# Altium PCB PCB1_Left Leg.PcbDoc
Units mm, origin at the board's own origin, x right, y up, seen from the top; angles counter-clockwise.
Board outline 70 x 20 mm, 4 copper layers (Top Layer, PWR5, PWR3.3, Bottom Layer), stack 0.603 mm thick; 43 components, 41 nets, 196 pads, 123 vias.
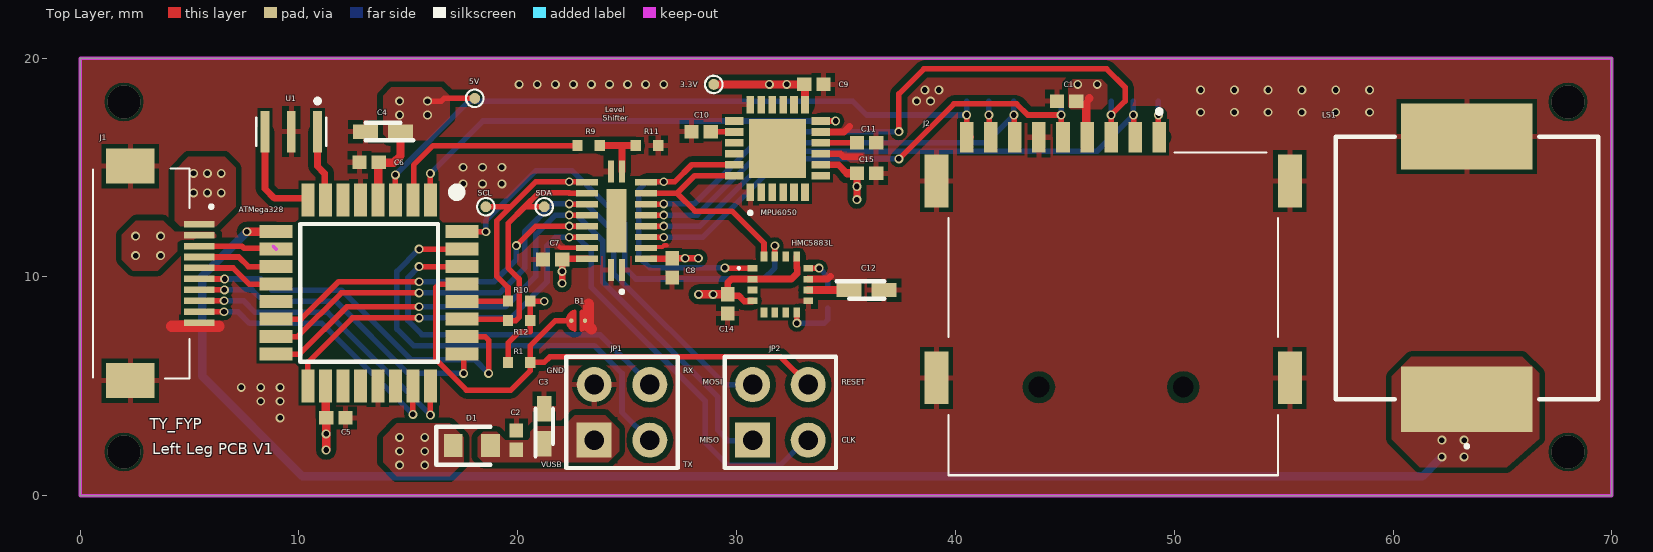
[diagram p0: Top Layer view]
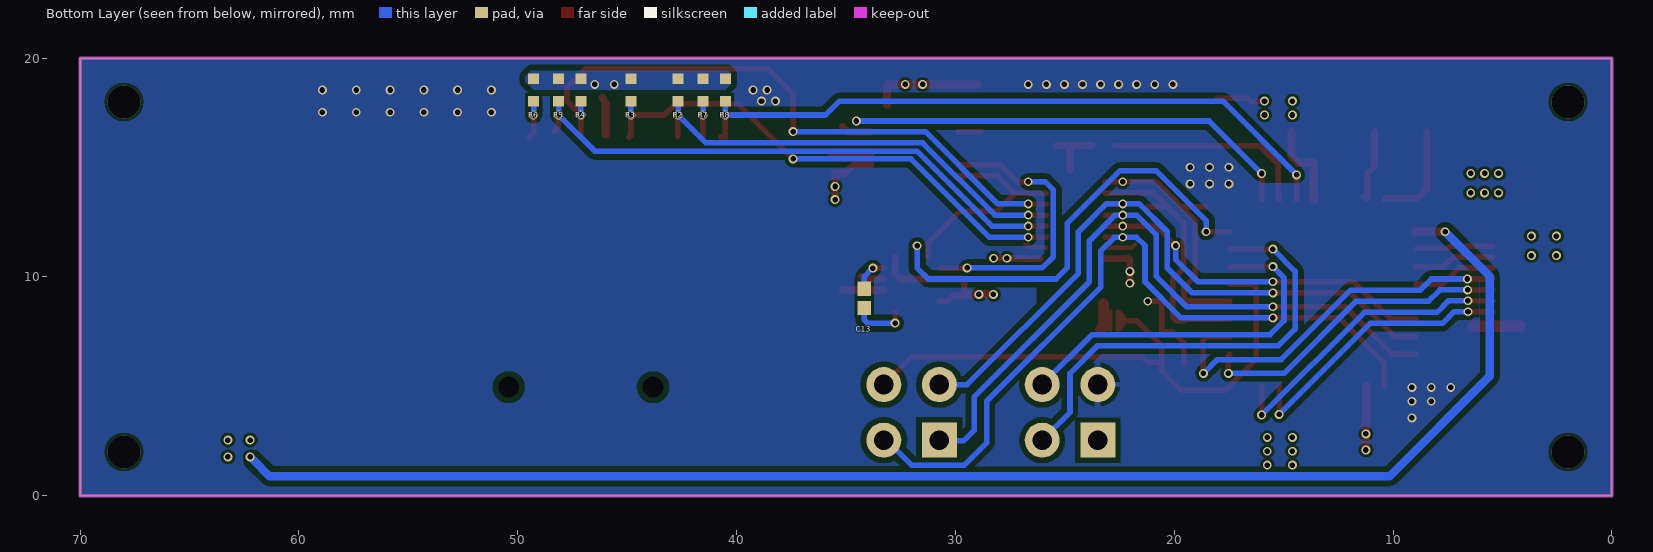
[diagram p1: Bottom Layer view, seen from below]
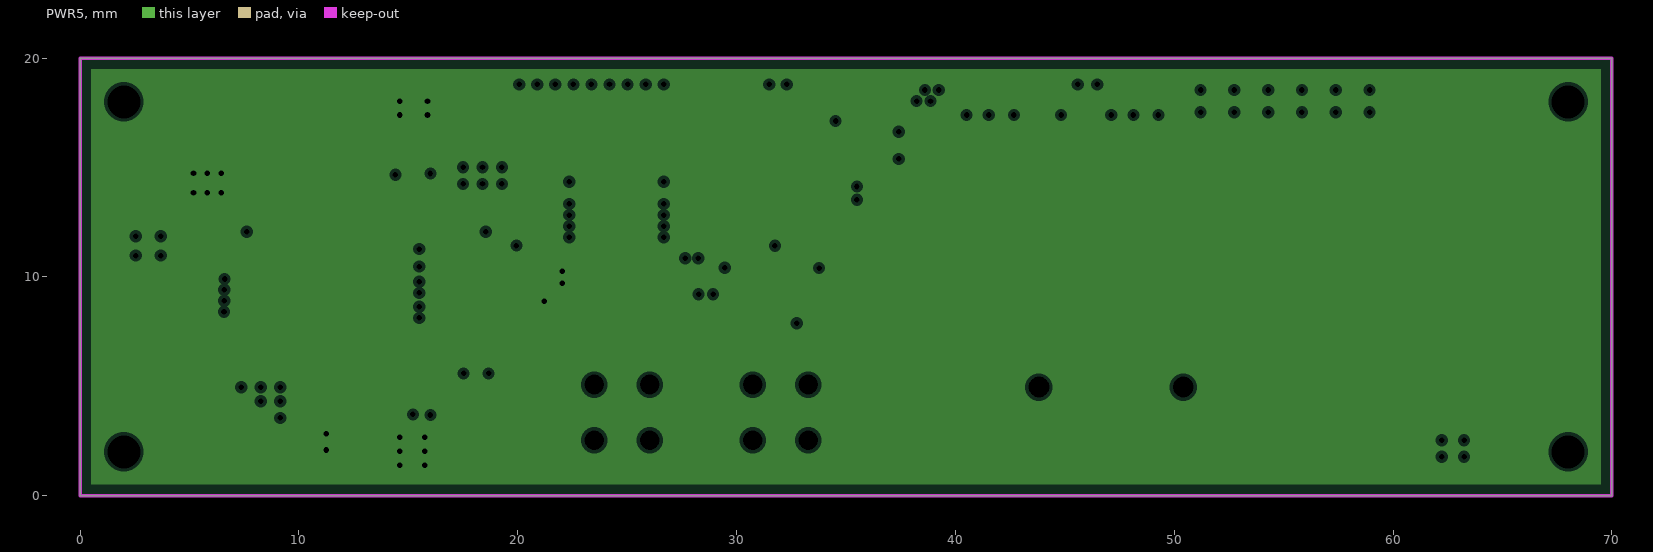
[diagram p2: PWR5, clearances drawn from the general rule]
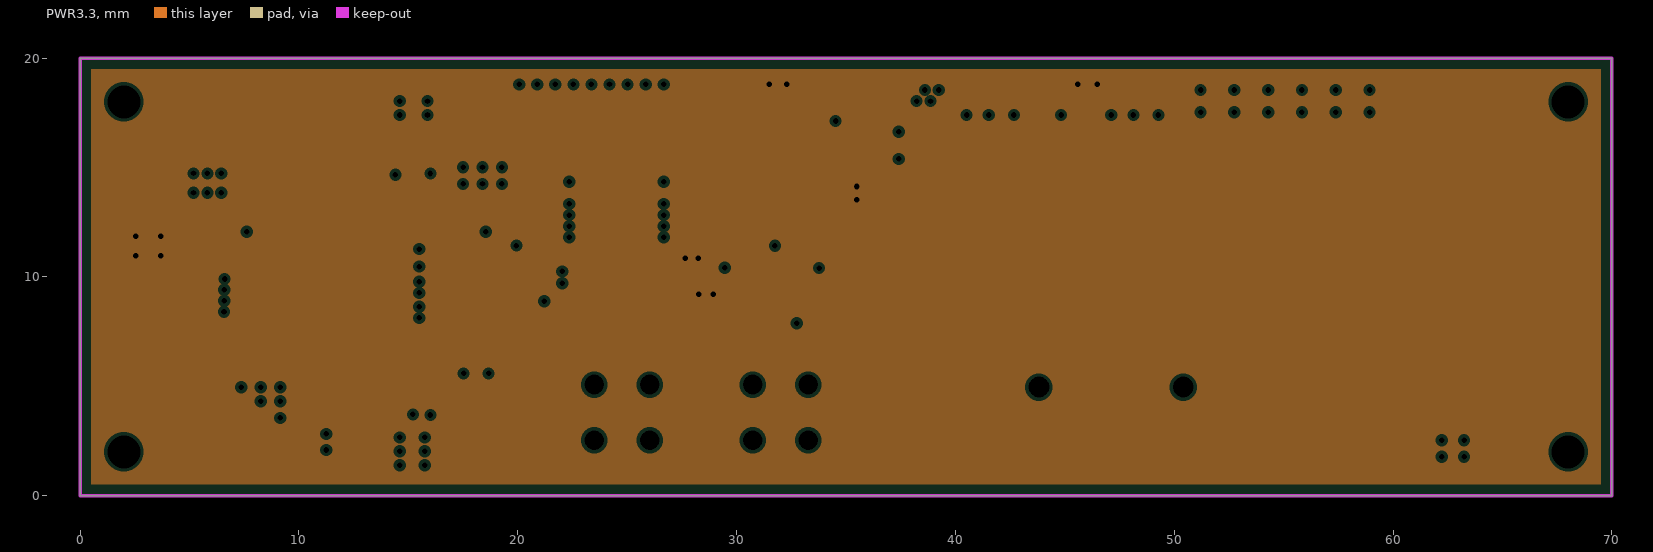
[diagram p3: PWR3.3, clearances drawn from the general rule]

## Layer stack, top to bottom
Top Solder: solder mask 0.0102, Solder Resist, Dk 3.5
Top Layer: signal copper 0.0356
Dielectric 2: prepreg 0.0711, PP-006, Dk 4.1
PWR5: plane copper 0.035, net 5V
Dielectric 1: dielectric 0.32, FR-4, Dk 4.8
PWR3.3: plane copper 0.035, net 3.3V
Dielectric 3: prepreg 0.0711, PP-006, Dk 4.1
Bottom Layer: signal copper 0.0356
Bottom Solder: solder mask 0.0102, Solder Resist, Dk 3.5

## Board outline
0,0 0,20 70,20 70,0

## Design rules (kind name [scope] priority, off if disabled: settings)
Clearance [All] p1: gap=0.254 ignorepadtopadclearanceinfootprint=FALSE except(0: Arc-Hole Track-Hole SMDPad-Hole THPad-Hole Via-Hole Fill-Hole Poly-Hole Region-Hole Text-Hole; 0.127: SMDPad-Poly Via-Poly)
PlaneClearance [All] p1: clearance=0.152
PlaneConnect [All] p1: planeconnectstyle=Relief reliefexpansion=0.127 reliefentries=4 reliefconductorwidth=0.152 reliefairgap=0.127
PolygonConnect [InNet('GND')] p1: thpad.connectstyle=Relief thpad.reliefconductorwidth=0.254 thpad.reliefentries=4 thpad.polygonreliefangle="90 Angle" thpad.airgapwidth=0.203 smdpad.connectstyle=Relief smdpad.reliefconductorwidth=0.254 smdpad.reliefentries=4 smdpad.polygonreliefangle="90 Angle" smdpad.airgapwidth=0.203 via.connectstyle=Direct via.reliefconductorwidth=0.254 via.reliefentries=4 via.polygonreliefangle="90 Angle" via.airgapwidth=0.203
PolygonConnect PolygonConnect_1 [All] p2: connectstyle=Direct reliefconductorwidth=0.254 reliefentries=4 polygonreliefangle="90 Angle" airgapwidth=0.254
RoutingVias [All] p1: holewidth=0.254 width=0.406 viastyle="Through Hole" minholewidth=0.254 minwidth=0.406 maxholewidth=0.508 maxwidth=0.508
SolderMaskExpansion [All] p1: expansion=0.064 useseparateexpansions=TRUE expansionbottom=0.064
Width [All] p1: maxlimit=1.524 minlimit=0.127 preferedwidth=0.152
28 further rules are at their usual default settings.

## Classes and differential pairs
component class "Main Board": 3.3V 5V ATMega328 B1 C1 C2 C3 C4 C5 C6 C8 C9 C10 C11 C12 C13 C14 C15 D1 HMC5883L J1 J2 JP1 JP2 LS1 MPU6050 R4 R5 R10 R11 R12 SCL SDA U1

## Components (designator, comment, footprint, x,y, rotation, side; value= is the part's Value field where it differs from the comment)
3.3V "Test Point" TP_SMD_D1.0mm 28.956,18.796 r90 top (schematic designator TP1)
5V "Test Point" TP_SMD_D1.0mm 18.034,18.161 r90 top (schematic designator TP2)
ATMega328 "ATMEGA328PB-AU" QFP80P900X900X120-32N 13.208,9.271 r270 top (schematic designator IC1)
B1 "solderbridge" Solderbridge 22.449,8.001 r0 top
C1 "0402_100n" CAPC1005X55N 45.085,18.034 r0 top
C2 "0402_100n" CAPC1005X55N 19.939,2.54 r90 top
C3 "0603_4.7u" CAPPM168X90N 21.209,3.175 r90 top
C4 "0603_4.7u" CAPPM168X90N 13.843,16.637 r180 top
C5 "0402_1u" CAPC1005X55N 11.684,3.556 r0 top
C6 "0402_1u" CAPC1005X55N 13.208,15.24 r180 top
C7 "0402_100n" CAPC1005X55N 21.59,10.795 r0 top
C8 "0402_100n" CAPC1005X55N 27.051,10.414 r90 top
C9 "0402_100n" CAPC1005X55N 33.528,18.796 r180 top
C10 "0402_2.2n" CAPC1005X55N 28.38,16.637 r0 top
C11 "0402_100n" CAPC1005X55N 35.941,16.129 r180 top
C12 "0603_4.7u" CAPPM168X90N 35.941,9.398 r0 top
C13 "0402_220n" CAPC1005X55N 34.163,9.017 r270 bottom
C14 "0402_100n" CAPC1005X55N 29.591,8.763 r270 top
C15 "0402_10n" CAPC1005X55N 35.941,14.732 r180 top
D1 "Schottky Diode 500mA" DIOC1709X85N 17.907,2.286 r0 top
HMC5883L "HMC5883L" HMC5883L 32.004,9.652 r0 top (schematic designator IC3)
IC2 "8 bit Translator" NXB0108BQX 24.511,12.573 r90 top
J1 "FFC Connector" 528921033 2.794,10.16 r270 top
J2 "MicroSD Connector" MEM20750014001A 47.212,8.658 r0 top
JP1 "Header2X2" HDR2.54-LI-2x2P 24.765,3.81 r0 top
JP2 "Header2X2" HDR2.54-LI-2x2P 32.004,3.81 r0 top
LS1 "Buzzer" CPT1212381SMTTR 63.373,10.414 r0 top
MPU6050 "MPU-6050" MPU_6050 31.877,15.875 r90 top (schematic designator IC4)
R1 "0402_10K" 0402_R 20.066,6.096 r180 top
R2 "0402_10K" 0402_R 42.672,18.542 r90 bottom
R3 "0402_10K" 0402_R 44.831,18.542 r90 bottom
R4 "0402_10K" 0402_R 47.117,18.542 r90 bottom
R5 "0402_10K" 0402_R 48.133,18.542 r90 bottom
R6 "0402_10K" 0402_R 49.276,18.542 r90 bottom
R7 "0402_10K" 0402_R 41.529,18.542 r90 bottom
R8 "0402_10K" 0402_R 40.513,18.542 r90 bottom
R9 "0402_5k" 0402_R 23.241,16.002 r180 top
R10 "0402_10k" 0402_R 20.066,8.89 r0 top
R11 "0402_10k" 0402_R 25.908,16.002 r180 top
R12 "0402_10k" 0402_R 20.066,8.001 r0 top
SCL "Test Point" TP_SMD_D1.0mm 18.542,13.208 r90 top (schematic designator TP3)
SDA "Test Point" TP_SMD_D1.0mm 21.209,13.208 r90 top (schematic designator TP4)
U1 "16MHz Osci" CSTNE16M0V530000R0 9.652,17.062 r180 top

## Footprints (in the part's own frame and the unit in brackets; to place one, negate y for a bottom-side part, rotate by r counter-clockwise, add the part's x,y. Pads: shape width x height; smd on the part's side, far side on the other; paste and mask are expansions set on the pad)
0402_R [mm]
  rect 0.475x0.5 smd: 1(-0.513,0) 2(0.513,0)
  body extent -0.5,-0.25 0.5,0.25, height 0.35
528921033 [mm]
  rect 0.3x1.4 smd: 1(-2.25,2.65) 2(-1.75,2.65) 3(-1.25,2.65) 4(-0.75,2.65) 5(-0.25,2.65) 6(0.25,2.65) 7(0.75,2.65) 8(1.25,2.65) 9(1.75,2.65) 10(2.25,2.65)
  rect 1.6x2.2 smd: MP1(-4.9,-0.5) MP2(4.9,-0.5)
  silkscreen extent -4.8,-2.2 4.8,3.25, body extent -5.54,-2.2 5.54,3.32, height 2.1
CAPC1005X55N [mm]
  rect 0.65x0.62 smd: 1(-0.44,0) 2(0.44,0)
  body extent -0.5,-0.25 0.5,0.25, height 0.55
CAPPM168X90N [mm]
  rect 1.15x0.65 smd: 1(-0.8,0) 2(0.8,0)
  silkscreen extent -1.38,-0.4 0.8,0.4, body extent -0.8,-0.4 0.8,0.4, height 0.9
CPT1212381SMTTR [mm]
  rect 6x3 smd: 1(0,-6) 2(0,6)
  silkscreen extent -6,-8.2 6,6, body extent -6,-7.2 6,7.2, height 3.4
CSTNE16M0V530000R0 [mm]
  rect 0.4x1.9 smd: 1(-1.2,0.425) 2(0,0.425) 3(1.2,0.425)
  silkscreen extent -1.6,-1.07 1.6,1.07, body extent -1.6,-0.19 1.6,1.11, height 0.9
DIOC1709X85N [mm]
  rect 0.85x1.05 smd: 1(-0.85,0) 2(0.85,0)
  silkscreen extent -1.63,-0.87 0.85,0.87, body extent -0.85,-0.45 0.85,0.45, height 0.85
HDR2.54-LI-2x2P [mm] "双排排针，2x2脚"
  rect 1.6x1.6 hole 0.9: 1(-1.27,-1.27)
  round 1.6 hole 0.9: 2(-1.27,1.27) 3(1.27,-1.27) 4(1.27,1.27)
  silkscreen extent -2.54,-2.54 2.54,2.54, body extent -2.54,-2.54 2.54,2.54, height 8.5
HMC5883L [mm]
  rect 0.45x0.3 smd: 1(-1.275,0.75) 2(-1.275,0.25) 3(-1.275,-0.25) 4(-1.275,-0.75) 9(1.275,-0.75) 10(1.275,-0.25) 11(1.275,0.25) 12(1.275,0.75)
  rect 0.3x0.45 smd: 5(-0.75,-1.275) 6(-0.25,-1.275) 7(0.25,-1.275) 8(0.75,-1.275) 13(0.75,1.275) 14(0.25,1.275) 15(-0.25,1.275) 16(-0.75,1.275)
  silkscreen extent -1.95,0.7 -1.85,0.8, body extent -1.5,-1.5 1.5,1.5, height 0.9
MEM20750014001A [mm]
  round 0.475 hole 0.95 unplated: 14(-3.395,-3.695) 15(3.205,-3.695)
  rect 1.1x2.4 smd: MP1(-8.075,5.725) MP2(-8.075,-3.275) MP3(8.075,-3.275) MP4(8.075,5.725)
  rect 0.62x1.4 smd: P1(2.105,7.725) P2(1.005,7.725) P3(-0.095,7.725) P4(-1.195,7.725) P5(-2.295,7.725) P6(-3.395,7.725) P7(-4.495,7.725) P8(-5.595,7.725) P9(-6.695,7.725)
  silkscreen extent -7.52,-7.73 7.52,9, body extent -8.21,-8 8.23,7.85, height 1.4
MPU_6050 [mm]
  rect 0.8x0.35 smd: 1(-2,1.25) 2(-2,0.75) 3(-2,0.25) 4(-2,-0.25) 5(-2,-0.75) 6(-2,-1.25) 13(2,-1.25) 14(2,-0.75) 15(2,-0.25) 16(2,0.25) 17(2,0.75) 18(2,1.25)
  rect 0.35x0.85 smd: 7(-1.25,-1.975) 8(-0.75,-1.975) 9(-0.25,-1.975) 10(0.25,-1.975) 11(0.75,-1.975) 12(1.25,-1.975) 19(1.25,1.975) 20(0.75,1.975) 21(0.25,1.975) 22(-0.25,1.975) 23(-0.75,1.975) 24(-1.25,1.975)
  rect 2.7x2.6 smd: 25(0,0)
  silkscreen extent -3,1.2 -2.9,1.3, body extent -2,-2 2,2, height 0.88
NXB0108BQX [mm]
  rect 1x0.29 smd: 1(-2.25,-0.25) 10(2.25,-0.25) 11(2.25,0.25) 20(-2.25,0.25)
  rect 0.29x1 smd: 2(-1.75,-1.35) 3(-1.25,-1.35) 4(-0.75,-1.35) 5(-0.25,-1.35) 6(0.25,-1.35) 7(0.75,-1.35) 8(1.25,-1.35) 9(1.75,-1.35) 12(1.75,1.35) 13(1.25,1.35) 14(0.75,1.35) 15(0.25,1.35) 16(-0.25,1.35) 17(-0.75,1.35) 18(-1.25,1.35) 19(-1.75,1.35)
  rect 2.9x0.9 smd: 21(0,0)
  silkscreen extent -3.3,-0.3 -3.2,-0.2, body extent -2.25,-1.25 2.25,1.25, height 1.1
QFP80P900X900X120-32N [mm]
  rect 1.5x0.6 smd: 1(-4.25,2.8) 2(-4.25,2) 3(-4.25,1.2) 4(-4.25,0.4) 5(-4.25,-0.4) 6(-4.25,-1.2) 7(-4.25,-2) 8(-4.25,-2.8) 17(4.25,-2.8) 18(4.25,-2) 19(4.25,-1.2) 20(4.25,-0.4) 21(4.25,0.4) 22(4.25,1.2) 23(4.25,2) 24(4.25,2.8)
  rect 0.6x1.5 smd: 9(-2.8,-4.25) 10(-2,-4.25) 11(-1.2,-4.25) 12(-0.4,-4.25) 13(0.4,-4.25) 14(1.2,-4.25) 15(2,-4.25) 16(2.8,-4.25) 25(2.8,4.25) 26(2,4.25) 27(1.2,4.25) 28(0.4,4.25) 29(-0.4,4.25) 30(-1.2,4.25) 31(-2,4.25) 32(-2.8,4.25)
  silkscreen extent -4.8,-3.15 3.15,4.2, body extent -4.5,-4.5 4.5,4.5, height 1.2
Solderbridge [mm]
  round 0.2 smd paste-10: 1(0,0) 2(0.625,0)
  Top Layer region: 0.389,0.432 0.465,0.505 0.583,0.467 0.648,0.424 0.721,0.351 0.775,0.292 0.833,0.193 0.861,0.099 0.856,-0.122 0.831,-0.193 0.747,-0.33 0.663,-0.411 0.571,-0.469 0.47,-0.5 0.419,-0.483 0.389,-0.43
  Top Layer region: 0.236,-0.432 0.16,-0.505 0.042,-0.467 -0.023,-0.424 -0.097,-0.351 -0.15,-0.292 -0.208,-0.193 -0.236,-0.099 -0.231,0.122 -0.206,0.193 -0.122,0.33 -0.038,0.411 0.054,0.469 0.155,0.5 0.206,0.483 0.236,0.43
  Top Layer lines w0.152: 0.159,-0.431 cw(c0.27,0) 0.127,-0.421 cw(c0.27,0) -0.074,-0.281 cw(c0.27,0) -0.175,0 cw(c0.27,0) 0.159,0.431 ; 0.465,-0.431 ccw(c0.355,0) 0.792,-0.078 ccw(c0.355,0) 0.792,0.078 ccw(c0.355,0) 0.465,0.431
TP_SMD_D1.0mm [mm]
  round 0.5 smd paste-5: 1(0,0)
  silkscreen extent -0.4,-0.4 0.4,0.4

## Part data
ATMega328: "Integrated Circuit", Manufacturer_Name=Microchip, Mouser2 Part Number=556-ATMEGA328PB-AU, Datasheet Link=https://componentsearchengine.com//ATMEGA328PB-AU.pdf, Height=1.2mm, Manufacturer_Part_Number=ATMEGA328PB-AU, Mouser2 Price/Stock=https://www.mouser.com/Search/Refine.aspx?Keyword=556-ATMEGA328PB-AU
C1 C2 C5 C6 C7 C8 C9 C10 C11 C13 C14 C15: library part 0603_C, "Capacitor", Manufacturer_Name=Vishay, Manufacturer_Part_Number=VJ0603HIFRQ1KIT, Datasheet Link=http://www.vishay.com/docs/45226/vj31xrohsautomlcc.pdf, Height=0.97mm
C3 C4 C12: library part 0603_Tan, "Capacitor Polarised", Manufacturer_Name=Vishay, Manufacturer_Part_Number=TMCJ0J475MTRF, Datasheet Link=https://componentsearchengine.com/Datasheets/1/TMCJ0J475MTRF.pdf, Height=0.9mm
D1: "Schottky Diode", Manufacturer_Name="Comchip Technology", Manufacturer_Part_Number=CDBU0520, Mouser2 Part Number=750-CDBU0520, Datasheet Link=https://componentsearchengine.com//CDBU0520.pdf, Height=0.85mm, Mouser2 Price/Stock=https://www.mouser.com/Search/Refine.aspx?Keyword=750-CDBU0520
HMC5883L: "Integrated Circuit", Manufacturer_Name=Honeywell, Datasheet Link=http://www.farnell.com/datasheets/1683374.pdf, Height=0.9mm, Manufacturer_Part_Number=HMC5883L
IC2: "Integrated Circuit", Manufacturer_Name=Nexperia, Manufacturer_Part_Number=NXB0108BQX, Datasheet Link=https://assets.nexperia.com/documents/data-sheet/NXB0108.pdf, Height=1mm
J1: "Connector", Manufacturer_Name=Molex, Manufacturer_Part_Number=52892-1033, Datasheet Link=https://componentsearchengine.com/Datasheets/2/52892-1033.pdf, Height=2mm
J2: library part MEM2075-00-140-01-A, "Connector", Manufacturer_Name="GCT (GLOBAL CONNECTOR TECHNOLOGY)", Height=1.45mm, Manufacturer_Part_Number=MEM2075-00-140-01-A
JP1 JP2: library part "Header 2X2", "Header 2X2"
LS1: "Loudspeaker or Buzzer", Manufacturer_Name="CUI Inc.", Manufacturer_Part_Number=CPT-12123-81-SMT-TR, Datasheet Link=https://www.cuidevices.com/product/resource/cpt-12123-81-smt-tr.pdf, Height=3.3mm
MPU6050: "Integrated Circuit", Manufacturer_Name=TDK, Datasheet Link=https://invensense.tdk.com/wp-content/uploads/2015/02/MPU-6000-Datasheet1.pdf, Height=0.95mm, Manufacturer_Part_Number=MPU-6050
R1 R2 R3 R4 R5 R6 R7 R8 R9 R10 R11 R12: library part 0402_R, "Resistor", Manufacturer_Name=Panasonic, Manufacturer_Part_Number=ERA-2ARB472X, Datasheet Link=http://industrial.panasonic.com/cdbs/www-data/pdf/RDM0000/AOA0000C307.pdf, Height=0.4mm
U1: "Undefined or Miscellaneous", Manufacturer_Name="Murata Electronics", Manufacturer_Part_Number=CSTNE16M0V530000R0, Mouser2 Part Number=81-CSTNE16M0V530000R, Datasheet Link=https://componentsearchengine.com//CSTNE16M0V530000R0.pdf, Height=1mm, Mouser2 Price/Stock=https://www.mouser.com/Search/Refine.aspx?Keyword=81-CSTNE16M0V530000R

## Via types
v1: diameter 0.406, hole 0.254, Top Layer to Bottom Layer, tented both sides, 119 vias
v2: diameter 1.5, hole 1.5, Top Layer to Bottom Layer, 4 vias

## Nets (pads, with @x,y where several pads share a name; then routed paths per layer and width w, separated by ;. In a path a pad name is that pad's centre, name@x,y a point inside that pad or via, vN(x,y) a via of type N, cw(c..) or ccw(c..) an arc to the next point about the centre after c; other vN are vias at no path point)
3.3V: 3.3V.1 C1.2 C8.2 C9.2 C14.1 C15.2 HMC5883L.2 HMC5883L.4 HMC5883L.13 IC2.2 J1.2 J2.P4 MPU6050.8 MPU6050.13 R2.2 R3.2 R4.2 R5.2 R6.2 R7.2 R8.2 | length 18.7
  Top Layer w0.305: IC2.2@26.131,10.829 C8.2@26.949,10.829 ; C8.2 v1(28.253,10.854) ; HMC5883L.4 30.727,8.9 30.615,8.9 30.606,8.89 30.353,8.89 30.099,9.144 29.65,9.144 C14.1 29.591,9.727 29.77,9.906 30.074,9.906 30.076,9.904 30.727,9.904 HMC5883L.2 32.508,9.902 32.766,10.16 32.766,10.413 32.756,10.422 32.756,10.925 HMC5883L.13 ; MPU6050.8 34.659,15.125 35.052,14.732 ; v1(35.501,13.53) C15.2
  Top Layer w0.381: v1(28.262,9.203) v1(28.927,9.203) C14.1 ; 3.3V.1 v1(31.496,18.796) v1(32.292,18.796) C9.2 ; MPU6050.13 C9.2@33.127,18.72 ; 35.052,14.732 C15.2 ; J2.P4@45.974,16.526 45.974,17.907 ; 46.124,18.161 46.126,18.159
  other v1: 27.652,10.854 2.54,10.973 3.683,10.973 2.54,11.862 3.683,11.862 35.501,14.131 45.593,18.796 46.482,18.796
5V: 5V.1 ATMega328.4 ATMega328.18 C4.1 C5.1 C6.1 C7.2 D1.1 IC2.19 J1.1 R1.2 R10.2 R12.2 | length 15.5
  Top Layer w0.254: v1(15.875,18.034) 16.51,18.034 16.637,18.161 5V.1 ; R1.2 19.558,6.101 19.558,6.985 20.071,7.498 20.579,7.498 R12.2 R10.2 21.19,8.89 v1@21.199,8.9
  Top Layer w0.305: v1(22.03,9.711) C7.2 C7.2@22.058,10.823 ; C7.2@22.098,10.863 C7.2@22.058,10.823 ; IC2.19 C7.2@22.058,10.823
  Top Layer w0.381: ATMega328.18 11.226,5.003 11.226,3.574 C5.1 v1(11.244,2.823) v1(11.244,2.091) ; ATMega328.4 13.628,13.541 13.628,15.22 14.331,15.22 14.643,15.532 C4.1
  other v1: 14.605,1.397 15.748,1.397 14.605,2.032 15.748,2.032 14.605,2.667 15.748,2.667 21.209,8.89 22.03,10.253 5.182,13.843 5.817,13.843 6.452,13.843 5.182,14.732 5.817,14.732 6.452,14.732 14.605,17.399 15.875,17.399 14.605,18.034
Button1: ATMega328.11 J1.4 | length 3.7
  Top Layer w0.254: J1.4 7.251,10.91 7.69,10.471 ATMega328.11
Button2: ATMega328.12 J1.5 | length 3.8
  Top Layer w0.254: J1.5 5.446,10.408 6.991,10.408 7.728,9.671 ATMega328.12
Buzzer1: ATMega328.9 LS1.1 | length 67.5
  Top Layer w0.254: ATMega328.9 ATMega328.9@8.964,12.065
  Top Layer w0.381: v1(7.62,12.065) 7.626,12.071 ATMega328.9
  Bottom Layer w0.381: v1(7.62,12.065) 5.588,10.033 5.588,5.461 10.16,0.889 61.341,0.889 v1@62.103,1.651
  other v1: 62.23,1.778 63.246,1.778 62.23,2.54 63.246,2.54
Buzzer2: ATMega328.10 J1.3 | length 3.6
  Top Layer w0.254: J1.3 7.386,11.41 7.493,11.303 8.926,11.303 ATMega328.10
CS_3.3: IC2.5 J2.P2 R5.1 | length 25.9
  Top Layer w0.254: IC2.5 25.863,12.321 26.668,12.321 v1(26.67,12.319) ; v1(48.133,17.399) 48.143,17.389 48.143,16.847 J2.P2@48.352,16.638
  Bottom Layer w0.254: v1(26.67,12.319) 28.321,12.319 31.75,15.748 46.482,15.748 v1(48.133,17.399) R5.1
CS_5: ATMega328.14 IC2.16 | length 16.3
  Top Layer w0.254: ATMega328.14 10.103,8.071 11.811,9.779 v1(15.494,9.779) ; v1(19.939,11.43) 20.828,12.319 v1(22.352,12.319) 22.354,12.321 23.159,12.321 IC2.16
  Bottom Layer w0.254: v1(15.494,9.779) 18.923,9.779 19.939,10.795 v1(19.939,11.43)
GND: ATMega328.5 ATMega328.21 B1.2 C1.1 C2.2 C3.2 C4.2 C5.2 C6.2 C7.1 C8.1 C9.1 C10.1 C11.1 C12.2 C14.2 C15.1 HMC5883L.9 HMC5883L.11 IC2.1 IC2.3 IC2.11 IC2.18 IC2.20 J1.10 J1.MP1 J1.MP2 J2.MP1 J2.MP2 J2.MP3 J2.MP4 J2.P6 JP1.2 LS1.2 MPU6050.1 MPU6050.9 MPU6050.11 MPU6050.18 R11.1 U1.2 | length 10.2
  Top Layer w0.203: 21.793,11.481 21.951,11.323 IC2.18 ; IC2.3 25.904,11.366 26.614,11.366 26.7,11.452 26.819,11.452
  Top Layer w0.305: HMC5883L.11 34.159,9.902 34.29,10.033 ; MPU6050.9 34.751,15.625 34.882,15.494 35.687,15.494 ; MPU6050.11 34.913,16.625 35.179,16.891
  Top Layer w0.508: 4.191,7.747 6.35,7.747 ; 23.241,8.763 23.241,8.079 23.241,7.923 23.241,7.747 23.368,7.62
  other v1: 9.144,3.556 8.255,4.318 9.144,4.318 7.366,4.953 8.255,4.953 9.144,4.953 17.501,14.249 18.39,14.249 19.279,14.249 17.501,15.011 18.39,15.011 19.279,15.011 51.202,17.526 52.747,17.526 54.293,17.526 55.838,17.526 57.383,17.526 58.928,17.526 38.227,18.034 38.862,18.034 38.608,18.542 39.243,18.542 51.202,18.542 52.747,18.542 54.293,18.542 55.838,18.542 57.383,18.542 58.928,18.542 20.066,18.796 20.892,18.796 21.717,18.796 22.543,18.796 23.368,18.796 24.194,18.796 25.019,18.796 25.845,18.796 26.67,18.796
INT_5883: ATMega328.32 HMC5883L.15 | length 20.7
  Top Layer w0.254: ATMega328.32 18.536,12.071 v1(18.542,12.065) ; HMC5883L.15 v1(31.754,11.426)
  Bottom Layer w0.254: v1(18.542,12.065) 18.542,12.573 20.828,14.859 22.479,14.859 24.892,12.446 24.892,10.414 25.4,9.906 31.242,9.906 31.75,10.414 31.75,11.422 v1(31.754,11.426)
INT_6050: ATMega328.1 MPU6050.12 | length 21.4
  Top Layer w0.254: ATMega328.1 v1(16.008,14.726) ; MPU6050.12 v1(34.524,17.125)
  Bottom Layer w0.254: v1(16.008,14.726) 18.407,17.125 v1(34.524,17.125)
LED1: ATMega328.26 J1.6 | length 17.8
  Top Layer w0.254: J1.6 5.448,9.906 v1(6.604,9.906) ; ATMega328.26 18.51,7.271 18.669,7.112 v1(18.669,5.588)
  Bottom Layer w0.254: v1(6.604,9.906) 8.252,9.906 8.76,9.398 11.938,9.398 15.113,6.223 18.034,6.223 v1(18.669,5.588)
LED2: ATMega328.25 J1.7 | length 14.6
  Top Layer w0.254: J1.7 v1(6.592,9.41) ; ATMega328.25 17.526,6.403 v1(17.526,5.588)
  Bottom Layer w0.254: v1(6.592,9.41) 7.862,9.41 8.382,8.89 11.684,8.89 14.986,5.588 v1(17.526,5.588)
LED3: ATMega328.24 J1.8 | length 14.1
  Top Layer w0.254: J1.8 v1(6.584,8.91) ; v1(16.008,3.689) ATMega328.24
  Bottom Layer w0.254: v1(6.584,8.91) 7.473,8.91 8.001,8.382 11.315,8.382 v1(16.008,3.689)
LED4: ATMega328.23 J1.9 | length 13
  Top Layer w0.254: J1.9 v1(6.576,8.41) ; v1(15.208,3.715) ATMega328.23
  Bottom Layer w0.254: v1(6.576,8.41) 7.211,8.41 7.747,7.874 11.049,7.874 v1(15.208,3.715)
MISO_3.3: IC2.6 J2.P7 R2.1 | length 20.3
  Top Layer w0.254: IC2.6 25.863,12.825 26.668,12.825 v1(26.67,12.827) ; v1(42.672,17.399) 42.682,17.389 J2.P7@42.682,16.418
  Bottom Layer w0.254: v1(26.67,12.827) 28.194,12.827 31.496,16.129 41.402,16.129 v1(42.672,17.399) R2.1
MISO_5: ATMega328.16 IC2.15 JP2.1 | length 32.6
  Top Layer w0.254: ATMega328.16 10.027,6.471 12.192,8.636 v1(15.494,8.636) ; v1(22.352,12.827) 22.354,12.825 23.159,12.825 IC2.15
  Bottom Layer w0.254: v1(15.494,8.636) 19.431,8.636 20.828,10.033 20.828,11.938 21.717,12.827 v1(22.352,12.827) 22.362,12.817 22.711,12.817 23.876,11.652 23.876,9.779 29.146,4.508 29.146,2.984 29.613,2.518 30.712,2.518 JP2.1
MOSI_3.3: IC2.7 J2.P3 R4.1 | length 28.8
  Top Layer w0.254: IC2.7 25.867,13.329 26.664,13.329 v1(26.67,13.335) ; v1(37.414,16.637) 37.414,18.364 38.557,19.507 46.914,19.507 47.752,18.669 47.752,18.034 v1(47.117,17.399) J2.P3
  Bottom Layer w0.254: v1(26.67,13.335) 28.067,13.335 31.369,16.637 v1@37.211,16.637 ; v1(47.117,17.399) R4.1
MOSI_5: ATMega328.15 IC2.14 JP2.2 | length 30.6
  Top Layer w0.254: ATMega328.15 9.938,7.271 11.938,9.271 v1(15.494,9.271) ; v1(22.352,13.335) 22.358,13.329 23.155,13.329 IC2.14
  Bottom Layer w0.254: v1(15.494,9.271) 19.177,9.271 20.32,10.414 20.32,12.065 21.59,13.335 v1(22.352,13.335) 23.114,13.335 24.384,12.065 24.384,10.16 29.464,5.08 JP2.2
MS_CD: ATMega328.3 J2.P9 R8.1 | length 30.6
  Top Layer w0.254: ATMega328.3 14.411,13.524 v1(14.411,14.665) v1@14.414,14.668 ; v1(40.513,17.399) 40.515,17.397 40.515,16.385 J2.P9 ; J2.P9@40.685,16.383 J2.P9@40.712,16.41
  Bottom Layer w0.254: v1@14.414,14.668 17.78,18.034 35.306,18.034 35.941,17.399 v1(40.513,17.399) R8.1
NetC10_2: C10.2 MPU6050.20 | length 1.1
  Top Layer w0.254: C10.2 28.826,16.631 29.896,16.631 MPU6050.20
NetC11_2: C11.2 MPU6050.10 | length 1.7
  Top Layer w0.254: MPU6050.10 33.854,16.127 35.499,16.127 C11.2 C11.2@35.56,16.129
NetC12_1: C12.1 HMC5883L.10 | length 1.9
  Top Layer w0.254: HMC5883L.10 HMC5883L.10@33.281,9.4 ; C12.1@35.139,9.4 C12.1
  Top Layer w0.381: HMC5883L.10@33.281,9.4 C12.1@35.139,9.4
NetC13_1: C13.1 HMC5883L.12 | length 1.6
  Top Layer w0.254: HMC5883L.12 v1(33.77,10.402)
  Bottom Layer w0.254: v1(33.77,10.402) 33.784,10.402 34.163,10.023 C13.1
NetC13_2: C13.2 HMC5883L.8 | length 2.5
  Top Layer w0.254: v1(32.754,7.886) HMC5883L.8
  Bottom Layer w0.254: v1(32.754,7.886) 34.014,7.886 34.163,8.035 C13.2
NetIC2_10: IC2.10 R9.1 R11.2 | length 2.8
  Top Layer w0.305: R9.1 24.765,16.002 ; IC2.10 24.761,15.998 24.765,16.002 ; R11.2 24.765,16.002
NetJ2_P1: J2.P1 R6.1 | length 1.7
  Top Layer w0.254: v1(49.276,17.399) 49.276,16.592 J2.P1@49.485,16.383
  Bottom Layer w0.254: v1(49.276,17.399) R6.1
NetJ2_P8: J2.P8 R7.1 | length 1.7
  Top Layer w0.254: v1(41.529,17.399) 41.539,17.389 41.539,16.461 J2.P8
  Bottom Layer w0.254: v1(41.529,17.399) R7.1
OE: ATMega328.2 R9.2 | length 9.5
  Top Layer w0.254: ATMega328.2 15.24,13.553 15.24,15.113 16.129,16.002 R9.2
RESET: ATMega328.29 B1.1 JP2.4 R1.1 | length 27
  Top Layer w0.254: ATMega328.29@17.467,9.661 ATMega328.29 16.405,9.671 16.256,9.522 16.256,6.223 17.653,4.826 19.685,4.826 20.574,5.715 20.574,6.091 R1.1 ; 22.438,7.707 B1.1@22.438,8.001 ; B1.1 B1.1@22.438,8.001 ; JP2.4 32.004,6.35 21.463,6.35 21.209,6.096 R1.1 ; R1.1 20.579,6.863 21.717,8.001 22.274,8.001 B1.1@22.438,8.001
RX: ATMega328.30 JP1.4 | length 16.9
  Top Layer w0.254: v1(15.494,10.471) ATMega328.30
  Bottom Layer w0.254: v1(15.494,10.471) 14.986,9.963 14.986,8.001 15.621,7.366 23.749,7.366 JP1.4
SCK_3.3: IC2.4 J2.P5 R3.1 | length 23.4
  Top Layer w0.254: IC2.4 25.867,11.817 26.664,11.817 v1(26.67,11.811) ; v1(37.414,15.392) 39.929,17.907 42.799,17.907 43.307,17.399 v1(44.831,17.399) 44.841,17.389 44.841,16.459 J2.P5
  Bottom Layer w0.254: v1(26.67,11.811) 28.448,11.811 32.029,15.392 v1(37.414,15.392) ; v1(44.831,17.399) R3.1
SCK_5: ATMega328.17 IC2.17 JP2.3 | length 35
  Top Layer w0.254: ATMega328.17 10.408,6.09 12.446,8.128 v1(15.494,8.128) ; v1(22.352,11.811) 22.358,11.817 23.155,11.817 IC2.17
  Bottom Layer w0.254: v1(15.494,8.128) 19.685,8.128 21.336,9.779 21.336,11.43 21.717,11.811 v1(22.352,11.811) 22.733,11.811 23.368,11.176 23.368,9.525 28.575,4.318 28.575,2.413 29.591,1.397 32.004,1.397 33.147,2.54 JP2.3
SCL_3.3: HMC5883L.1 IC2.9 MPU6050.23 | length 14.1
  Top Layer w0.254: IC2.9 25.879,14.341 26.646,14.341 26.656,14.351 v1(26.67,14.351) 27.178,14.351 27.952,15.125 MPU6050.23 ; v1(29.464,10.414) 29.476,10.402 HMC5883L.1
  Bottom Layer w0.254: v1(26.67,14.351) 25.908,14.351 25.527,13.97 25.527,10.922 26.035,10.414 v1(29.464,10.414)
SCL_5: ATMega328.28 IC2.12 R10.1 SCL.1 | length 12
  Top Layer w0.254: ATMega328.28 17.467,8.881 19.544,8.881 R10.1 19.553,9.525 19.05,10.028 19.05,12.573 19.621,13.144 ; SCL.1 19.558,13.208 19.621,13.144 ; IC2.12 23.143,14.341 22.376,14.341 22.366,14.351 v1(22.352,14.351) 20.828,14.351 19.621,13.144
SDA_3.3: HMC5883L.16 IC2.8 MPU6050.24 | length 9.9
  Top Layer w0.254: IC2.8 27.285,13.823 ; MPU6050.24 28.087,14.625 27.285,13.823 ; HMC5883L.16 31.254,11.545 29.791,13.008 28.101,13.008 27.285,13.823
SDA_5: ATMega328.27 IC2.13 R12.1 SDA.1 | length 12.3
  Top Layer w0.254: ATMega328.27 18.542,8.071 18.552,8.061 19.493,8.061 R12.1 19.917,8.001 20.066,8.15 20.066,9.906 19.558,10.414 19.558,12.446 20.32,13.208 ; SDA.1 20.32,13.208 ; IC2.13 23.151,13.833 22.362,13.833 22.352,13.843 20.955,13.843 20.32,13.208
TX: ATMega328.31 JP1.3 | length 20.7
  Top Layer w0.254: v1@15.526,11.271 ATMega328.31
  Bottom Layer w0.254: v1(15.494,11.271) 14.478,10.255 14.478,7.62 15.24,6.858 23.495,6.858 24.765,5.588 24.765,3.81 JP1.3
VUSB: C2.1 C3.1 D1.2 JP1.1
XTAL1: ATMega328.7 U1.1 | length 3.4
  Top Layer w0.254: ATMega328.7@11.176,13.553 ATMega328.7 ATMega328.7@11.327,13.64
  Top Layer w0.305: U1.1 10.852,15.056 11.176,14.732 11.176,13.791 ATMega328.7@11.327,13.64
XTAL2: ATMega328.8 U1.3 | length 4.8
  Top Layer w0.305: U1.3 8.452,14.027 8.89,13.589 10.34,13.589 ATMega328.8
pads on no net: ATMega328.6 ATMega328.13 ATMega328.19 ATMega328.20 ATMega328.22 HMC5883L.3 HMC5883L.5 HMC5883L.6 HMC5883L.7 HMC5883L.14 IC2.21 J2.14 J2.15 MPU6050.2 MPU6050.3 MPU6050.4 MPU6050.5 MPU6050.6 MPU6050.7 MPU6050.14 MPU6050.15 MPU6050.16 MPU6050.17 MPU6050.19 MPU6050.21 MPU6050.22 MPU6050.25
copper on no net:
  other v2: 2,2 68,2 2,18 68,18

## Polygon pours and split planes (outlines as drawn)
GND on Top Layer "Top Layer-GND" (solid, remove dead copper, pour order 36): 70.001,19.999 70,0 0,0 0,19.999
3.3V on Top Layer "Top Layer-3.3V 1" (solid, pour order 32): 46.677,17.653 46.931,17.907 46.931,18.779 46.685,19.025 45.364,19.025 45.153,18.813 45.153,17.78 45.28,17.653
Buzzer1 on Top Layer "Top Layer-Buzzer1" (solid, pour order 26): 66.675,2.596 66.675,5.588 65.913,6.35 60.833,6.35 59.944,5.461 59.944,2.58 61.214,1.31 65.205,1.31
3.3V on Top Layer "Top Layer-3.3V" (solid, pour order 4): 6.096,11.684 6.223,11.811 6.223,11.938 6.096,12.065 4.318,12.065 3.81,12.573 2.54,12.573 1.905,11.938 1.905,10.795 2.413,10.287 3.556,10.287 4.445,11.176 4.445,11.557 4.572,11.684
5V on Top Layer "Top Layer-5V 1" (solid, pour order 22): 17.526,2.667 16.891,3.302 14.478,3.302 13.843,2.667 13.843,1.524 14.478,0.889 16.891,0.889 17.526,1.524
VUSB on Top Layer "Top Layer-VUSB" (solid, pour order 18): 24.638,3.048 24.003,3.683 22.606,3.683 22.098,3.175 20.828,3.175 20.574,2.921 20.574,2.667 20.447,2.54 19.431,2.54 19.05,2.921 18.415,2.921 18.161,2.667 18.161,1.778 18.415,1.524 24.13,1.524 24.638,2.032
5V on Top Layer "Top Layer-5V 2" (solid, pour order 14): 15.875,16.256 16.637,17.018 16.891,17.272 16.891,18.288 16.51,18.669 14.224,18.669 13.843,18.288 13.843,16.51 14.097,16.256
no net on Top Layer "NONET_L01_P012" (solid, pour order 12): 7.239,11.303
no net on Top Layer "NONET_L01_P010" (solid, pour order 10): 7.239,11.303
5V on Top Layer "Top Layer-5V" (solid, pour order 0): 4.699,12.192 6.096,12.192 7.112,13.208 7.112,14.986 6.604,15.494 4.953,15.494 4.318,14.859 4.318,12.573
GND on Bottom Layer "Bottom Layer-GND" (solid, remove dead copper, pour order 38): 0,20 0,0 70,0 70,20
3.3V on Bottom Layer "Bottom Layer-3.3V" (solid, pour order 34): 40.259,18.796 40.513,18.542 49.276,18.542 49.657,18.923 49.657,19.177 49.403,19.431 40.386,19.431 40.259,19.304
5V on PWR5 (split plane): 69.49,0.51 0.51,0.51 0.51,19.49 69.49,19.49
3.3V on PWR3.3 (split plane): 69.49,0.51 0.51,0.51 0.51,19.49 69.49,19.49

## Keep-outs
Top Layer:
  lines w0.152: 8.819,11.41 8.958,11.271
Keep-Out Layer:
  the board outline again, w0.152

## Other copper
Top Layer:
  pour cut-out: 23.754,15.588 24.347,15.588 24.347,15.526 23.815,15.526
  pour cut-out: 16.367,14.875 16.29,14.952 16.29,15.614 15.628,14.952 15.628,14.908 15.727,15.007 15.859,14.875
  pour cut-out: 16.383,11.659 16.581,11.659 16.581,12.498 16.383,12.3
  pour cut-out: 25.234,14.595 23.788,14.595 23.788,10.975 25.234,10.975
  pour cut-out: 47.364,18.508 47.364,18.195 47.19,18.021 47.19,18.682
  pour cut-out: 47.168,18.704 47.19,18.682 47.19,18.601
  pour cut-out: 44.48,15.556 49.754,15.556 49.659,15.651 49.659,17.558 49.532,17.558 49.276,17.813 49.26,17.797 47.08,17.797 46.677,17.394 46.672,17.399 44.475,17.399 44.475,15.561
  pour cut-out: 40.122,17.519 42.678,17.519 43.154,17.043 43.154,15.556 40.08,15.556 40.122,15.598
  pour cut-out: 23.093,16.379 23.389,16.379 23.389,15.625 23.093,15.625
  pour cut-out: 9.981,12.644 16.435,12.644 16.581,12.498 16.383,12.3 16.383,5.842 10.037,5.842 9.835,6.044 9.835,12.498
Bottom Layer:
  pour cut-out: 34.893,17.025 35.866,17.025 35.162,17.729 17.932,17.729 14.563,14.36 14.563,14.31 15.968,14.31 16.002,14.344 15.643,14.702 15.643,14.881 18.246,17.484 34.673,17.484 34.673,17.245
  pour cut-out: 6.301,8.135 6.294,8.128 6.045,8.128 6.045,9.841 6.041,9.845 6.244,10.048 6.244,9.729 6.305,9.667 6.301,9.663
  pour cut-out: 26.289,9.652 26.162,9.525 25.4,9.525 26.289,8.636

## Silkscreen, mask and mechanical layers (free items; w line width, h text height)
Top Overlay:
  text "Level" at 24.003,17.526 h0.25
  text "Shifter" at 23.876,17.145 h0.25
  text "GND" at 21.336,5.588 h0.25
  text "RX" at 27.559,5.588 h0.25
  text "MOSI" at 28.448,5.08 h0.25
  text "RESET" at 34.798,5.08 h0.25
  text "TY_FYP" at 3.175,3.048 h0.51
  text "MISO" at 28.321,2.413 h0.25
  text "CLK" at 34.798,2.413 h0.25
  text "Left Leg PCB V1" at 3.302,1.905 h0.51
  text "VUSB" at 21.082,1.312 h0.25
  text "TX" at 27.559,1.312 h0.25
Mechanical 1:
  the board outline again, w0.152

## Dimensions
0,0 to 70,0 on Mechanical 13
0,20 to 0,0 on Mechanical 13